# Altium PCB Dev_Brd_ATSAML10D16A.PcbDoc
Units mm, origin at the board's own origin, x right, y up, seen from the top; angles counter-clockwise.
Board outline 23 x 37.5 mm, 2 copper layers (Top Layer, Bottom Layer); 82 components, 51 nets, 219 pads, 91 vias.
Unrouted connection lines stored in the file: 2.
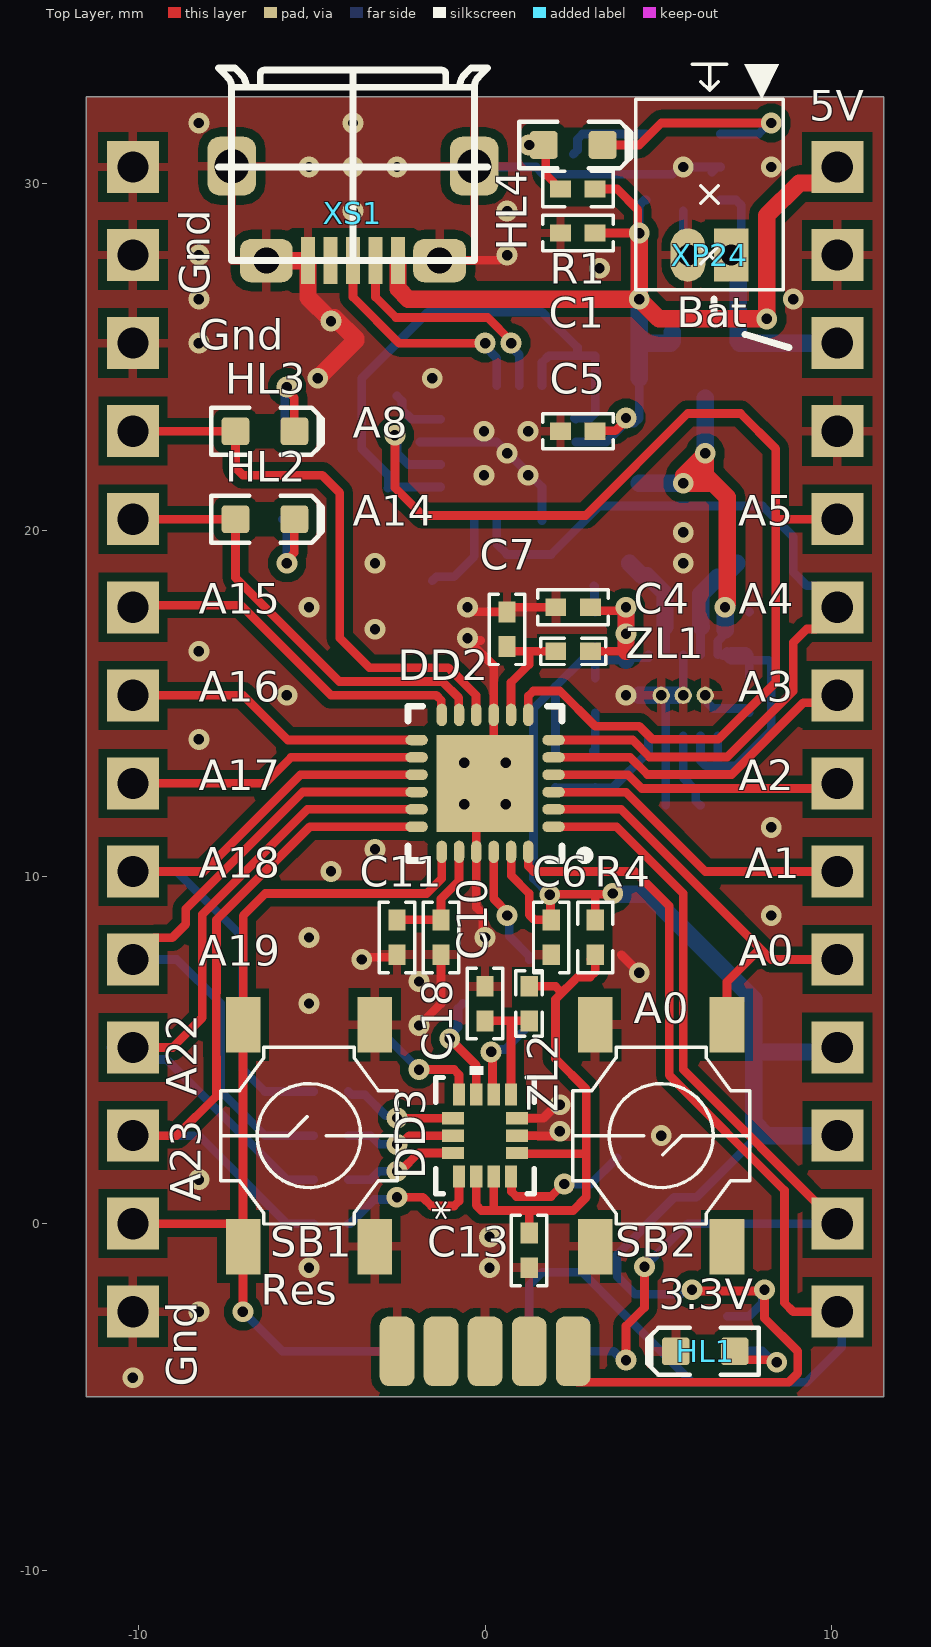
[diagram p0: Top Layer view]
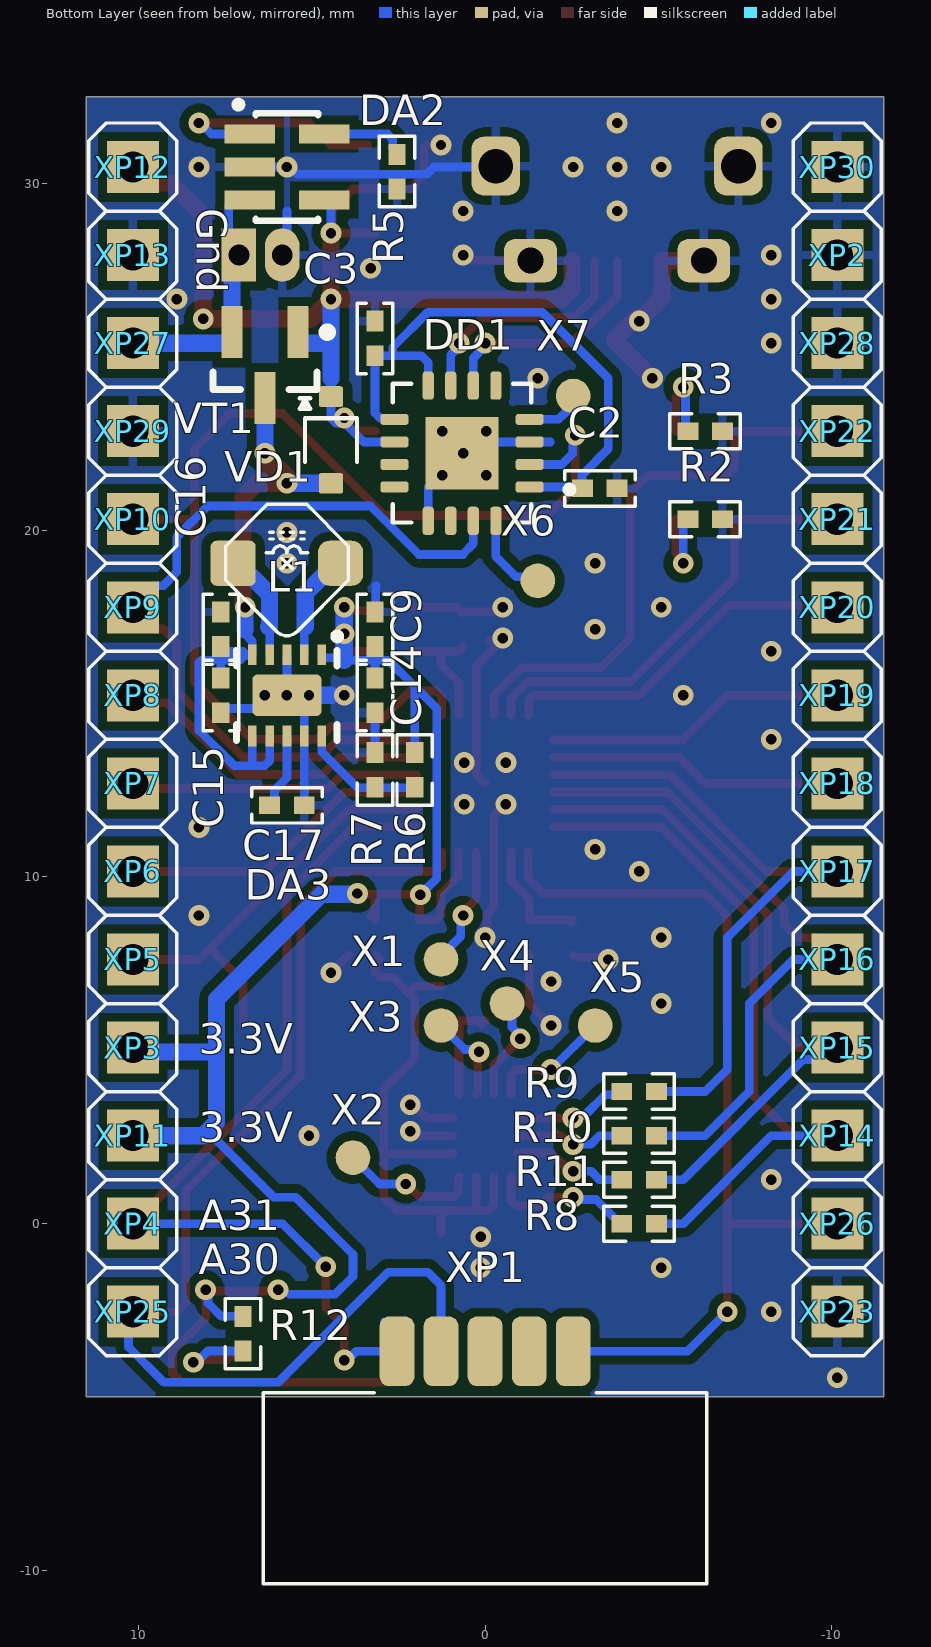
[diagram p1: Bottom Layer view, seen from below]
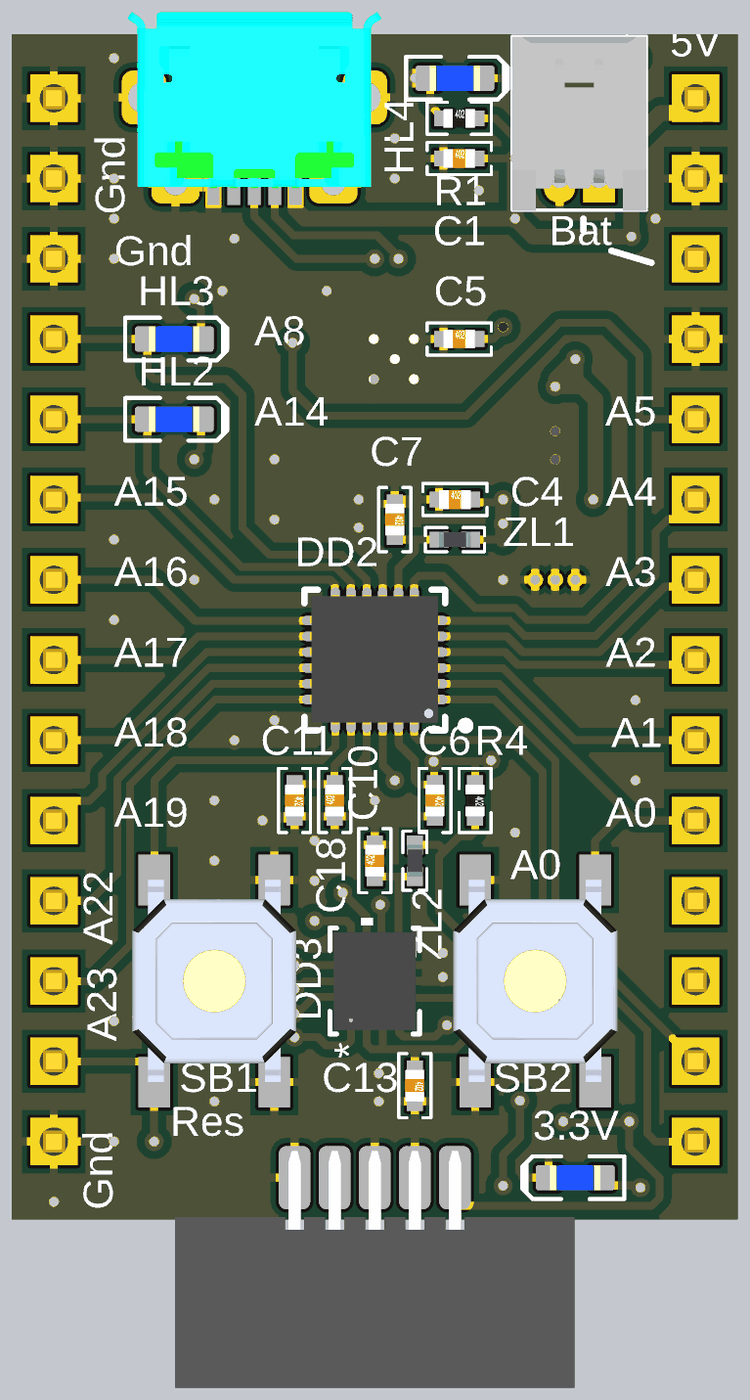
[diagram p2: 3D render of the assembled board from above, using the file's embedded part models]
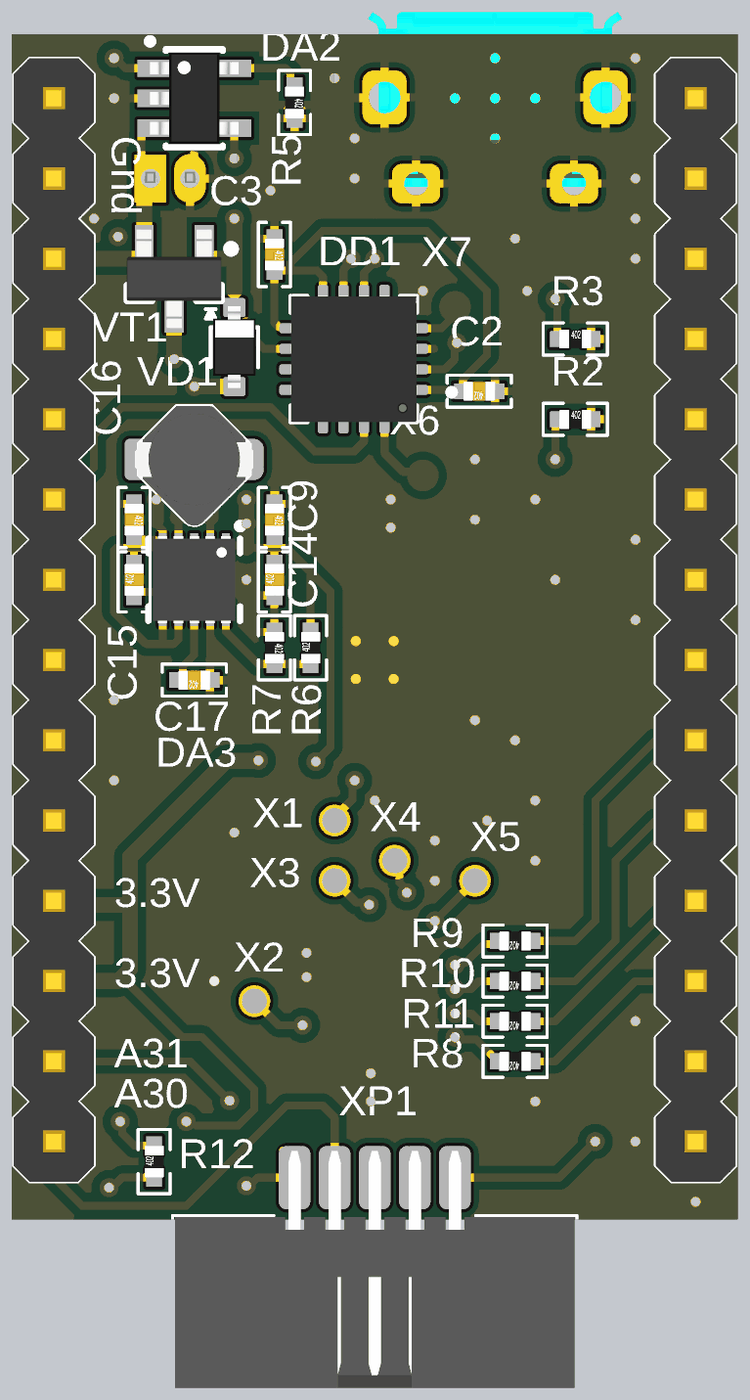
[diagram p3: 3D render of the assembled board from below, using the file's embedded part models]

## Layer stack, top to bottom
Top Solder: solder mask 0.0102, Solder Resist, Dk 3.5
Top Layer: signal copper 0.0356
Dielectric 1: dielectric 0.32, FR-4, Dk 4.8
Bottom Layer: signal copper 0.0356
Bottom Solder: solder mask 0.0102, Solder Resist, Dk 3.5

## Board outline
-11.5,-5 -11.5,32.5 11.5,32.5 11.5,-5

## Design rules (kind name [scope] priority, off if disabled: settings)
Clearance Clearance_InPoly [All vs InPoly] p1: gap=0.254 ignorepadtopadclearanceinfootprint=FALSE except(0: Arc-Hole Track-Hole SMDPad-Hole THPad-Hole Via-Hole Fill-Hole Poly-Hole Region-Hole Text-Hole)
Clearance [All] p2: gap=0.15 ignorepadtopadclearanceinfootprint=TRUE except(0: Arc-Hole Track-Hole SMDPad-Hole THPad-Hole Via-Hole Fill-Hole Poly-Hole Region-Hole Text-Hole)
ComponentClearance ComponentClearance_PLS [(ObjectKind = 'Component') And (Footprint = 'PLS-1-3D')] p1: gap=-1 collisioncheckmode=3 verticalgap=0.254 showdistances=FALSE
ComponentClearance [All] p2: gap=0.254 collisioncheckmode=3 verticalgap=0.254 showdistances=FALSE
PolygonConnect [All] p1: thpad.connectstyle=Relief thpad.reliefconductorwidth=0.254 thpad.reliefentries=4 thpad.polygonreliefangle="90 Angle" thpad.airgapwidth=0.254 smdpad.connectstyle=Relief smdpad.reliefconductorwidth=0.254 smdpad.reliefentries=4 smdpad.polygonreliefangle="90 Angle" smdpad.airgapwidth=0.254 via.connectstyle=Direct via.reliefconductorwidth=0.254 via.reliefentries=4 via.polygonreliefangle="90 Angle" via.airgapwidth=0.254
RoutingVias [All] p1: holewidth=0.5 width=0.8 viastyle="Through Hole" minholewidth=0.3 minwidth=0.6 maxholewidth=0.7 maxwidth=1
SolderMaskExpansion SolderMaskExpansion_IsVia [ISVia] p1: expansion=0.102 istentingtop=TRUE
SolderMaskExpansion [All] p2: expansion=0.102 istentingtop=FALSE
Width [All] p1: maxlimit=0.5 minlimit=0.15 preferedwidth=0.25
29 further rules are at their usual default settings.

## Components (designator, comment, footprint, x,y, rotation, side; value= is the part's Value field where it differs from the comment)
C1 "47uF 6.3V" CapKemet1005(0402) 2.675,28.575 r0 top
C2 "1u 10V" CapKemet1005(0402) -3.31,21.209 r0 bottom
C3 "100n 16V" CapKemet1005(0402) 3.175,25.535 r270 bottom
C4 "10u 6.3V 0402" CapKemet1005(0402) 2.54,17.78 r0 top
C5 "100n 16V" CapKemet1005(0402) 2.675,22.86 r0 top
C6 "100n 25V" CapKemet1005(0402) 1.905,8.255 r270 top
C7 "10u 6.3V 0402" CapKemet1005(0402) 0.635,17.145 r270 top
C9 "100n 16V" CapKemet1005(0402) 3.175,17.145 r270 bottom
C10 "10u 6.3V 0402" CapKemet1005(0402) -1.27,8.255 r90 top
C11 "100n 25V" CapKemet1005(0402) -2.54,8.255 r270 top
C13 "100n 25V" CapKemet1005(0402) 1.27,-0.77 r270 top
C14 "47uF 6.3V" CapKemet1005(0402) 3.175,15.24 r90 bottom
C15 "47uF 6.3V" CapKemet1005(0402) 7.62,15.24 r90 bottom
C16 "100n 16V" CapKemet1005(0402) 7.62,17.145 r270 bottom
C17 "100n 16V" CapKemet1005(0402) 5.715,12.065 r0 bottom
C18 "100n 25V" CapKemet1005(0402) 0,6.35 r90 top
DA2 "MCP73832T-2DFI/OT" SOT-23-5 5.715,30.48 r270 bottom
DA3 "TPS63031DSKT" WSON-10 5.715,15.24 r270 bottom
DD1 "FT230XQ-R" QFN-16(4x4) 0.665,22.225 r0 bottom
DD2 "ATSAML10D16A-MUT" VQFN-24 0,12.7 r180 top
DD3 "LSM6DSMTR" LGA-14L_2P5X3X0P83_STM-M 0,2.54 r90 top
HL1 "Bl 0603" LED-0603-BLUE 6.35,-3.683 r180 top
HL2 "Bl 0603" LED-0603-BLUE -6.35,20.32 r0 top
HL3 "Bl 0603" LED-0603-BLUE -6.35,22.86 r0 top
HL4 "Bl 0603" LED-0603-BLUE 2.54,31.115 r0 top
L1 "2.2UH 1.3" CDRH2D11 5.715,19.05 r90 bottom
R1 "620" "REZKemet 0402" 2.675,29.845 r0 top
R2 "620" "REZKemet 0402" -6.35,20.32 r180 bottom
R3 "620" "REZKemet 0402" -6.35,22.86 r180 bottom
R4 "0" "REZKemet 0402" 3.175,8.255 r270 top
R5 "5.1k" "REZKemet 0402" 2.54,30.345 r270 bottom
R6 "?" "REZKemet 0402" 2.032,13.089 r90 bottom
R7 "?" "REZKemet 0402" 3.175,13.089 r270 bottom
R8 "0" "REZKemet 0402" -4.445,0 r0 bottom
R9 "0" "REZKemet 0402" -4.445,3.81 r0 bottom
R10 "0" "REZKemet 0402" -4.445,2.54 r0 bottom
R11 "0" "REZKemet 0402" -4.445,1.27 r0 bottom
R12 "620" "REZKemet 0402" 6.985,-3.175 r90 bottom
SB1 "PTS525SM15SMTR2 LFS" "TACT_SWITCH KPT1187B" -5.08,2.54 r90 top
SB2 "PTS525SM15SMTR2 LFS" "TACT_SWITCH KPT1187B" 5.08,2.54 r270 top
VD1 "1N4148WSTR" SOD323 4.445,22.606 r270 bottom
VT1 "IRLML6401PbF" SOT23-3N 6.35,24.765 r270 bottom
X1 "PLLS1.27-1-TOP-R" PLLS1.27-1-TOP-R#1 1.27,7.62 r90 bottom
X2 "PLLS1.27-1-TOP-R" PLLS1.27-1-TOP-R#1 3.81,1.905 r90 bottom
X3 "PLLS1.27-1-TOP-R" PLLS1.27-1-TOP-R#1 1.27,5.715 r90 bottom
X4 "PLLS1.27-1-TOP-R" PLLS1.27-1-TOP-R#1 -0.635,6.35 r90 bottom
X5 "PLLS1.27-1-TOP-R" PLLS1.27-1-TOP-R#1 -3.175,5.715 r90 bottom
X6 "PLLS1.27-1-TOP-R" PLLS1.27-1-TOP-R#2 -1.524,18.542 r180 bottom
X7 "PLLS1.27-1-TOP-R" PLLS1.27-1-TOP-R#2 -2.54,23.876 r180 bottom
XP1 "3220-10-0100-00 edge" "IPS 10(1.27)edge" 0,-3.683 r180 bottom locked
XP2 "PLS-1" PLS-1-3D -10.16,27.94 r0 bottom
XP3 "PLS-1" PLS-1-3D 10.16,5.08 r0 bottom
XP4 "PLS-1" PLS-1-3D 10.16,0 r0 bottom
XP5 "PLS-1" PLS-1-3D 10.16,7.62 r0 bottom
XP6 "PLS-1" PLS-1-3D 10.16,10.16 r0 bottom
XP7 "PLS-1" PLS-1-3D 10.16,12.7 r0 bottom
XP8 "PLS-1" PLS-1-3D 10.16,15.24 r0 bottom
XP9 "PLS-1" PLS-1-3D 10.16,17.78 r0 bottom
XP10 "PLS-1" PLS-1-3D 10.16,20.32 r0 bottom
XP11 "PLS-1" PLS-1-3D 10.16,2.54 r0 bottom
XP12 "PLS-1" PLS-1-3D 10.16,30.48 r0 bottom
XP13 "PLS-1" PLS-1-3D 10.16,27.94 r0 bottom
XP14 "PLS-1" PLS-1-3D -10.16,2.54 r0 bottom
XP15 "PLS-1" PLS-1-3D -10.16,5.08 r0 bottom
XP16 "PLS-1" PLS-1-3D -10.16,7.62 r0 bottom
XP17 "PLS-1" PLS-1-3D -10.16,10.16 r0 bottom
XP18 "PLS-1" PLS-1-3D -10.16,12.7 r0 bottom
XP19 "PLS-1" PLS-1-3D -10.16,15.24 r0 bottom
XP20 "PLS-1" PLS-1-3D -10.16,17.78 r0 bottom
XP21 "PLS-1" PLS-1-3D -10.16,20.32 r0 bottom
XP22 "PLS-1" PLS-1-3D -10.16,22.86 r0 bottom
XP23 "PLS-1" PLS-1-3D -10.16,-2.54 r0 bottom
XP24 "0530480210" 0530480210 6.477,27.94 r0 top
XP25 "PLS-1" PLS-1-3D 10.16,-2.54 r0 bottom
XP26 "PLS-1" PLS-1-3D -10.16,0 r0 bottom
XP27 "PLS-1" PLS-1-3D 10.16,25.4 r0 bottom
XP28 "PLS-1" PLS-1-3D -10.16,25.4 r0 bottom
XP29 "PLS-1" PLS-1-3D 10.16,22.86 r90 bottom
XP30 "PLS-1" PLS-1-3D -10.16,30.48 r90 bottom
XS1 "10118194-0001LF" "MICRO_USB _B" -3.81,30.48 r180 top
ZL1 "BLM15PX471SN1D" Ferrite1005(0402) 2.54,16.51 r180 top
ZL2 "470Ohms@100MHz" Ferrite1005(0402) 1.27,6.35 r270 top

## Footprints (in the part's own frame and the unit in brackets; to place one, negate y for a bottom-side part, rotate by r counter-clockwise, add the part's x,y. Pads: shape width x height; smd on the part's side, far side on the other; paste and mask are expansions set on the pad)
0530480210 [mm] "CONN HEADER R/A 2POS 1.25MM"
  rect 1x1.524 hole 0.6: 1(0.625,0)
  oval 1x1.54 hole 0.6: 2(-0.625,0)
  silkscreen extent -2.12,-1 2.12,5.5, body extent -2.12,-1.02 2.12,4.48, height 3.35
CapKemet1005(0402) [mm] "Chip Capacitor, Body 1.0x0.5mm, IPC High Density"
  rect 0.6x0.5 smd: 1(-0.5,0) 2(0.5,0)
  silkscreen extent -1.02,-0.51 1.02,0.51, body extent -0.5,-0.3 0.5,0.3, height 0.2
CDRH2D11 [mm]
  rrect25% 1.3x1.3 smd: 1(0,1.55)
  rrect50% 1.3x1.3 smd: 2(0,-1.55)
  silkscreen extent -2.09,-1.77 1.7,1.77, body extent -2.33,-2.33 2.33,2.33, height 1.1
Ferrite1005(0402) [mm]
  rect 0.6x0.5 smd: 1(-0.5,0) 2(0.5,0)
  silkscreen extent -0.94,-0.38 0.94,0.38, body extent -0.5,-0.25 0.5,0.25, height 0.5
"IPS 10(1.27)edge" [mm]
  rrect50% 1x2 smd: 1(2.54,0) 3(1.27,0) 5(0,0) 7(-1.27,0) 9(-2.54,0)
  rrect50% 1x2 smd far side: 2(2.54,0) 4(1.27,0) 6(0,0) 8(-1.27,0) 10(-2.54,0)
  silkscreen extent -6.4,-6.7 6.4,-1.2, body extent -6.32,-6.65 6.33,0.85, height 2.45
LED-0603-BLUE [mm]
  round 0.254 on Mech15: 0(0,0)
  rrect25% 0.8x0.8 smd: A(-0.85,0) K(0.85,0)
  Top Layer pour cut-out: -0.5,0.5 0.5,0.5 0.5,-0.5 -0.5,-0.5
  silkscreen extent -1.55,-0.67 1.68,0.67, body extent -0.8,-0.4 0.8,0.4, height 0.75
LGA-14L_2P5X3X0P83_STM-M [mil]
  rect 25x14 smd paste+0 mask+0: 1(-46.5,29.53) 2(-46.5,9.84) 3(-46.5,-9.84) 4(-46.5,-29.53) 8(46.5,-29.53) 9(46.5,-9.84) 10(46.5,9.84) 11(46.5,29.53)
  rect 14x25 smd paste+0 mask+0: 5(-19.68,-36.5) 6(0,-36.5) 7(19.68,-36.5) 12(19.68,36.5) 13(0,36.5) 14(-19.68,36.5)
  silkscreen extent -66,-56 79,56, body extent -61,-51 61,51, height 34
"MICRO_USB _B" [mm]
  rect 0.4x1.35 smd: 1(-1.3,2.7) 2(-0.65,2.7) 3(0,2.7) 4(0.65,2.7) 5(1.3,2.7)
  rrect50% 1.4x1.7 hole 1: 6(-3.5,-0.025) 6(3.5,-0.025)
  rrect50% 1.524x1.25 hole 0.75: 6(-2.5,2.7) 6(2.5,2.7)
  silkscreen extent -3.88,-2.85 3.88,2.7, body extent -4.02,-2.73 4.02,2.85, height 2.63
PLLS1.27-1-TOP-R#1 [mm]
  round 1 smd paste-0.1: 1(0,0)
PLLS1.27-1-TOP-R#2 [mm]
  round 1 smd paste-25.375 mask+0.102: 1(0,0)
PLS-1-3D [mm] "Connector; Header; 1 Position"
  rect 1.5x1.5 hole 0.9: 1(0,0)
  silkscreen extent -1.27,-1.27 1.27,1.27, body extent -1.27,-1.27 1.27,1.27, height 8.44
QFN-16(4x4) [mm]
  rrect50% 0.81x0.32 smd: 1(-1.95,0.975) 2(-1.95,0.325) 3(-1.95,-0.325) 4(-1.95,-0.975) 9(1.95,-0.975) 10(1.95,-0.325) 11(1.95,0.325) 12(1.95,0.975)
  rrect50% 0.32x0.81 smd: 5(-0.975,-1.95) 6(-0.325,-1.95) 7(0.325,-1.95) 8(0.975,-1.95) 13(0.975,1.95) 14(0.325,1.95) 15(-0.325,1.95) 16(-0.975,1.95)
  rect 2.1x2.1 smd paste-2: 17(0,0)
  silkscreen extent -3.2,-2 2,2, body extent -2,-2 2,2, height 0.92
"REZKemet 0402" [mm] "Chip Capacitor, Body 1.0x0.5mm, IPC High Density"
  rect 0.6x0.5 smd: 1(-0.5,0) 2(0.5,0)
  silkscreen extent -1.02,-0.51 1.02,0.51, body extent -0.5,-0.3 0.5,0.3, height 0.2
SOD323 [mm] "SOD-323; 2 Leads; Body 1.8 x 1.35 mm, (LxW)"
  round 0.508 on Mech15: 0(0,0)
  rrect25% 0.6x0.7 smd: 1(-1.25,0) 2(1.25,0)
  silkscreen extent -1.2,-0.9 0.64,0.75, body extent -1.3,-0.68 1.3,0.67, height 1.1
SOT23-3N [mm] "SOT23, 3-Leads, Body 2.9x1.3mm, Pitch 0.95mm, Lead Span 2.5mm, IPC Medium Density"
  rect 1.5x0.6 smd: 1(-0.95,0.95) 2(-0.95,-0.95) 3(0.95,0)
  silkscreen extent -1.07,-1.5 0.7,1.92, body extent -1.57,-1.5 1.57,1.5, height 1
SOT-23-5 [mm] "SOT-23/SC-74A; 5 Leads; Body 3 x 3.1 mm, inc. leads (LxW max)"
  rect 0.55x1.45 smd: 1(-0.95,-1.075) 2(0,-1.075) 3(0.95,-1.075) 4(0.95,1.075) 5(-0.95,1.075)
  silkscreen extent -1.9,-1.5 1.55,0.9, body extent -1.45,-1.4 1.45,1.4, height 1.45
"TACT_SWITCH KPT1187B" [mm] "SMD_Button 5.2x5.2x1.6"
  rect 1.6x1 smd: 1(-3.2,1.9) 1(3.2,1.9) 2(-3.2,-1.9) 2(3.2,-1.9)
  silkscreen extent -2.55,-2.55 2.55,2.55, body extent -3.2,-2.6 3.2,2.6, height 1.5
VQFN-24 [mm] "QFN, 24-Leads, Body 4x4mm, Pitch 0.5mm, IPC High Density"
  oval 0.65x0.3 smd: 1(-1.975,1.25) 2(-1.975,0.75) 3(-1.975,0.25) 4(-1.975,-0.25) 5(-1.975,-0.75) 6(-1.975,-1.25) 13(1.975,-1.25) 14(1.975,-0.75) 15(1.975,-0.25) 16(1.975,0.25) 17(1.975,0.75) 18(1.975,1.25)
  oval 0.3x0.65 smd: 7(-1.25,-1.975) 8(-0.75,-1.975) 9(-0.25,-1.975) 10(0.25,-1.975) 11(0.75,-1.975) 12(1.25,-1.975) 19(1.25,1.975) 20(0.75,1.975) 21(0.25,1.975) 22(-0.25,1.975) 23(-0.75,1.975) 24(-1.25,1.975)
  rect 2.8x2.8 smd: 25(0,0)
  silkscreen extent -3,-2.22 2.22,2.22, body extent -2.05,-2.07 2.05,2.03, height 1
WSON-10 [mm] "SON, 10-Leads, Body 2,50x2,50mm,"
  rect 0.6x0.25 smd: 1(-1.17,1) 2(-1.17,0.5) 3(-1.17,0) 4(-1.17,-0.5) 5(-1.17,-1) 6(1.17,-1) 7(1.17,-0.5) 8(1.17,0) 9(1.17,0.5) 10(1.17,1)
  round 0.5 hole 0.3: 11(0,-0.635) 11(0,0) 11(0,0.635)
  rrect25% 1.2x2 smd: 11(0,0)
  silkscreen extent -1.8,-1.45 1.3,1.55, body extent -1.38,-1.3 1.38,1.3, height 0.8

## Part data
C1 C14 C15: library part GRM188R60J476ME15D, "CAP CER 47UF 6.3V X5R 0603", Digi-Key Part Number=490-13247-1-ND, Package=0603, HelpURL=https://www.digikey.com/en/products/detail/murata-electronics/GRM188R60J476ME15D/5877410, Manufacturer Part Number=GRM188R60J476ME15D, Part Number=GRM188R60J476ME15D, Price$=0.16924
C2: library part CAPC1005(0402)N, "CAP CER 1UF 10V 10% X6S 0402", Manufacturer Part Number=LMK105BJ105KPLF, Mouser Part Number=963-LMK105BJ105KPLF, Package=0402, HelpURL=https://eu.mouser.com/ProductDetail/Taiyo-Yuden/LMK105BJ105KPLF?qs=sGAEpiMZZMs0AnBnWHyRQIHQ3Mw87cdo1QzgwSlYWOQcjHYBR0FFrA%3D%3D, Part Number=CAPC1005(0402)N, Price$=0.11
C3 C5 C9 C16 C17: library part CL05F104ZO5NNNC, "Cap Cer 0.1uF 16V 1% C0G(NP0) MLCC", Digi-Key Part Number=1276-1004-1-ND, Package=0402, HelpURL=https://www.digikey.com/product-detail/en/CL05F104ZO5NNNC/1276-1004-1-ND/3889090/?itemSeq=332907103, Manufacturer Part Number=CL05F104ZO5NNNC, Part Number=CL05F104ZO5NNNC, Price$=0.00475
C4 C7 C10: library part CAPC1608(0603), "CAP CER 10UF 6.3V X5R 0402", Digi-Key Part Number=GRJ155R60J106ME11D, Code_JEDEC=0402, HelpURL=https://www.digikey.com/product-detail/en/murata-electronics-north-america/GRJ155R60J106ME11D/490-13211-1-ND/5877419, Manufacturer Part Number=GRJ155R60J106ME11D, Part Number=CAPC1608(0603), Price$=0.22
C6 C11: library part CAPC1608(0603), "CAP CER 0.1UF 25V X5R 0402", Digi-Key Part Number=732-7495-1-ND, Manufacturer Part Number=885012105018, Code_JEDEC=0402, HelpURL=https://www.digikey.com/product-detail/en/wurth-electronics-inc/885012105018/732-7495-1-ND/5454122, Part Number=CAPC1608(0603), Price$=0.11
C13 C18: library part CL05B104KA5NNNC, "CAP CER 0.1UF 25V X7R 0402", Digi-Key Part Number=1276-6720-1-ND, Package=0402, HelpURL=https://www.digikey.com/en/products/detail/samsung-electro-mechanics/CL05B104KA5NNNC/5961204, Manufacturer Part Number=CL05B104KA5NNNC, Part Number=CL05B104KA5NNNC, Price$=0.00487
DA2: "IC LI-ION/LI-POLY CTRLR SOT23-5", Digi-Key Part Number=MCP73832T-2DFI/OTCT-ND, HelpURL=https://www.digikey.com/product-detail/en/MCP73832T-2DFI%2fOT/MCP73832T-2DFI%2fOTCT-ND/2060344/?itemSeq=274027917, Part Number=MCP73832T-2DFI/OT
DA3: "IC REG BCK BST 3.3V 900MA 10SON", Digi-Key Part Number=296-23904-1-ND, HelpURL=https://www.digikey.com/en/products/detail/texas-instruments/TPS63031DSKT/1967863, Manufacturer Part Number=TPS63031DSKT, Part Number=TPS63031DSKT, Price$=2,28
DD1: "IC USB SERIAL BASIC UART 16QFN", Digi-Key Part Number=768-1130-1-ND, HelpURL=https://www.digikey.com/en/products/detail/ftdi-future-technology-devices-international-ltd/FT230XQ-R/3029142, Manufacturer Part Number=FT230XQ-R, Part Number=FT230XQ-R, Price$=2,04
DD2: "IC MCU 32BIT 64KB FLASH 24VQFN,ARM® Cortex®-M23", Digi-Key Part Number=ATSAML10D16A-MUTCT-ND, Code_JEDEC=VQFN-24, HelpURL=https://www.digikey.com/product-detail/en/microchip-technology/ATSAML10D16A-MUT/ATSAML10D16A-MUTCT-ND/9360576, Manufacturer Part Number=ATSAML10D16A-MUT, Part Number=ATSAML10D16A-MUT, Price$=1.82
DD3: "IMU ACCEL/GYRO I2C/SPI 14LGA", Digi-Key Part Number=497-16696-1-ND, Mouser Part Number=511-LSM6DSMTR, Built_By=EMA_Cory, Copyright="Copyright (C) 2018 Accelerated Designs. All rights reserved", Datasheet=https://www.st.com/content/ccc/resource/technical/document/datasheet/76/27/cf/88/c5/03/42/6b/DM00218116.pdf/files/DM00218116.pdf/jcr:content/translations/en.DM00218116.pdf, HelpURL=https://eu.mouser.com/ProductDetail/STMicroelectronics/LSM6DSMTR?qs=dTJS0cRn7ogKkf7uVmbVmg%3D%3D, HelpURL2=#https://www.digikey.com/product-detail/en/stmicroelectronics/LSM6DSMTR/497-16696-1-ND/6192778#, Manufacturer Part Number=LSM6DSMTR, Manufacturer_Part_Number=LSM6DSMTR, Part Number=LSM6DSMTR, Price$=2.92, RefDes=RefDes, SourceLibrary=Updates_to_database_2020-11-03, Type=DEV, Vendor=STMicroelectronics
HL1 HL2 HL3 HL4: library part 150060BS55040, "LED BLUE DIFFUSED 0603 SMD", Digi-Key Part Number=732-12013-1-ND, Package=0603, HelpURL=https://www.digikey.com/products/en?keywords=732-12013-1-ND, Manufacturer Part Number=150060BS55040, Part Number=150060BS55040
L1: library part CDRH2D11/HPNP-2R2NC, "FIXED IND 2.2UH 1.3A 120 MOHM", Digi-Key Part Number=308-1578-1-ND, HelpURL=https://www.digikey.com/product-detail/en/sumida-america-components-inc/CDRH2D11-HPNP-2R2NC/308-1578-1-ND/2620850, LatestRevisionDate=17-Jul-2002, LatestRevisionNote="Re-released for DXP Platform.", Manufacturer Part Number=CDRH2D11/HPNP-2R2NC, PackageDescription="Axial Device, Thru-Hole; 2 Leads; 0.9 in Pin Spacing", PackageReference=AXIAL-0.9, Part Number=CDRH2D11/HPNP-2R2NC, Price$=0.69, Published=24-Mar-1999, Publisher="Altium Limited"
R1 R2 R3 R6 R7 R12: library part RESC1005(0402), Package=0402, Part Number=RESC1005(0402)
R4 R8 R9 R10 R11: library part RMCF0402ZT0R00, "RES SMD 0402 0 Ohm", Mouser Part Number=RMCF0402ZT0R00CT-ND, Package=0402, HelpURL=https://www.digikey.com/en/products/detail/stackpole-electronics-inc/RMCF0402ZT0R00/1756905, Manufacturer Part Number=RMCF0402ZT0R00, Part Number=RMCF0402ZT0R00, Price$=0.00186
R5: library part RESC1005(0402), "RES SMD 5.1K OHM 1% 1/10W 0402", Manufacturer Part Number=ERJ-2RKF5101X, Mouser Part Number=755-SFR01MZPF5101, Package=0402, HelpURL=https://eu.mouser.com/ProductDetail/ROHM-Semiconductor/SFR01MZPF5101?qs=sGAEpiMZZMvdGkrng054t7z4BkURc4Lz8VVRSaz2ejIiXEQeYNXBXw%3D%3D, Part Number=RESC1005(0402), Price$=0.1
SB1 SB2: "SWITCH TACTILE SPST-NO 0.02A 15V", Digi-Key Part Number=CKN9104CT-ND, HelpURL=https://www.digikey.com/products/en?keywords=CKN9104CT-ND, Manufacturer Part Number="PTS525SM15SMTR2 LFS", Part Number="PTS525SM15SMTR2 LFS", Price$=0.33
VD1: "DIODE GEN PURP 75V 300MA SOD323", Digi-Key Part Number=1655-1359-1-ND, Manufacturer Part Number=?, Code_JEDEC=DO-204-AH, ComponentLink1Description="Manufacturer Link", ComponentLink1URL=http://www.fairchildsemi.com/, ComponentLink2Description=Datasheet, ComponentLink2URL=http://www.fairchildsemi.com/ds/1N%2F1N4148.pdf, DatasheetVersion=1997, HelpURL=https://www.digikey.com/product-detail/en/smc-diode-solutions/1N4148WSTR/1655-1359-1-ND/6022804, LatestRevisionDate=17-Jul-2002, LatestRevisionNote="Re-released for DXP Platform.", Note=?, Package=?, PackageDescription="Diode, Axial; Body 3.8 x 1.9 mm (LxDia. max), Lead Dia. 0.53 mm (max)", PackageReference=DO-35, Part Number=1N4148WSTR, Price$=?, Published=8-Jun-2000, Publisher="Altium Limited"
VT1: Digi-Key Part Number=???, HelpURL=https://www.infineon.com/dgdl/irlml6401pbf.pdf?fileId=5546d462533600a401535668b96d2634, Manufacturer Part Number=???, Note=???, Package=???, Part Number=IRLML6401PbF, Price$=???
XP1: "3220-10-0100-00", Digi-Key Part Number=1175-1627-ND, Package="Header 20POS 1.27mm", HelpURL=https://www.digikey.com/product-detail/en/cnc-tech/3220-10-0100-00/1175-1627-ND/3883661, Part Number="3220-10-0100-00 edge"
XP2 XP3 XP4 XP5 XP6 XP7 XP8 XP9 XP10 XP11 XP12 XP13 XP14 XP15 XP16 XP17 XP18 XP19 XP20 XP21 XP22 XP23 XP25 XP26 XP27 XP28 XP29 XP30: "CONN HEADER VERT 1POS", Digi-Key Part Number=S1011EC-01-ND, Manufacturer Part Number=PRPC001SAAN-RC, HelpURL=https://www.digikey.com/product-detail/en/sullins-connector-solutions/PRPC001SAAN-RC/S1011EC-01-ND/2775253, Part Number=PLS-1, Price$=0.05
XP24: "CONN HEADER R/A 2POS 1.25MM", Digi-Key Part Number=WM1742-ND, HelpURL=https://www.digikey.com/product-detail/en/molex/0530480210/WM1742-ND/242864, Manufacturer Part Number=0530480210, Part Number=0530480210, Price$=0.3
XS1: "USB Connectors 5P MICRO USB TYPE B RCPT W/ REAR PEGS", Digi-Key Part Number=609-4618-1-ND, Mouser Part Number=649-10118194-0001LF, HelpURL=https://eu.mouser.com/ProductDetail/Amphenol-FCI/10118194-0001LF?qs=%2Fha2pyFadugHQYubHEjQrWaf71KglMlHbfZ%2FBmSxIoqAM0lAnkBayw%3D%3D, Manufacturer Part Number=10118194-0001LF, Part Number=10118194-0001LF, Price$=0.265
ZL1: library part Ferrite1005(0402), "FERRITE BEAD 470 OHM 0402 1LN", Digi-Key Part Number=490-10662-1-ND, Code_JEDEC=0402, Manufacturer Part Number=BLM15PX471SN1D, Part Number=Ferrite1005(0402), Price$=0.15
ZL2: library part Ferrite1005(0402), "FERRITE BEAD 470 OHM 0402 1LN", Manufacturer Part Number=BLM15PX471SN1D, Package=0402, HelpURL=https://eu.mouser.com/ProductDetail/Murata-Electronics/BLM15PX471SN1D?qs=%2Fha2pyFadugFXr5biOyskwIVnWnam4MScgU55pluOIVbLGfRcJswjw%3D%3D, Mouser Part Number=BLM15PX471SN1D, Part Number=Ferrite1005(0402), Price$=0.14
X1 X2 X3 X4 X5 X6 X7: Part Number=PLLS1.27-1-TOP-R

## Via types
v1: diameter 0.6, hole 0.3, Top Layer to Bottom Layer, tented both sides, 91 vias

## Nets (pads, with @x,y where several pads share a name; then routed paths per layer and width w, separated by ;. In a path a pad name is that pad's centre, name@x,y a point inside that pad or via, vN(x,y) a via of type N, cw(c..) or ccw(c..) an arc to the next point about the centre after c; other vN are vias at no path point)
3,3V: C4.2 C6.1 C9.2 C14.2 DA3.1 DD2.23 R4.1 R6.2 R12.2 XP1.10 XP3.1 XP11.1 ZL1.1 | length 59.4
  Top Layer w0.25: DD2.23 0.76,10.715 0.76,10.035 1.27,9.525 1.27,8.909 1.416,8.763 C6.1@1.897,8.763 ; C6.1 C6.1@1.897,8.763 ; XP1.10@2.667,-4.572 8.763,-4.572 9.017,-4.318 9.017,-3.683 8.061,-2.727 v1@8.061,-1.945 ; ZL1.1 3.165,16.385 3.215,16.435 3.215,16.51 4.064,16.51 ; C4.2 3.136,17.684 3.874,17.684 3.902,17.713 4.035,17.713 4.064,17.684 v1(4.064,17.018) ; R4.1@3.3,8.88 R4.1 3.175,9.506 ; v1(3.683,9.525) 3.664,9.506 3.175,9.506 ; v1(5.969,-1.905) 6.009,-1.945 v1@8.061,-1.945 ; v1(8.061,-1.905) v1@8.061,-1.945 ; C6.1@1.897,8.763 1.886,8.774 1.886,9.467 v1(1.866,9.486) 1.886,9.506 3.175,9.506
  Top Layer w0.5: 4.064,16.51 v1(4.064,17.018) v1(4.064,17.78)
  Bottom Layer w0.25: v1(1.866,9.486) 1.397,9.955 1.397,14.859 2.032,15.494 ; R6.2 2.032,15.494 ; C14.2 3.175,16.256 ; C9.2 3.175,16.256 ; DA3.1 4.715,16.323 4.131,16.323 4.064,16.256 3.175,16.256 ; 5.648,-2.032 4.318,-2.032 3.81,-1.524 3.81,-0.889 5.461,0.762 6.096,0.762 8.001,2.667 ; R12.2 7.61,-2.675 7.994,-2.291 7.994,-1.972 v1(8.061,-1.905) ; 2.032,15.494 2.794,16.256 3.175,16.256
  Bottom Layer w0.5: v1(3.683,9.525) 3.702,9.506 4.718,9.506 7.747,6.477 7.747,2.921 8.128,2.54 XP11.1 ; 4.064,16.256 v1(4.064,17.018) v1(4.064,17.78) ; 7.874,4.953 10.033,4.953 XP3.1
+5V: C1.2 C5.2 DA2.4 DD1.10 R1.2 VD1.1 VT1.1 XP12.1 XS1.1 | length 31.4
  Top Layer w0.25: C5.2 3.183,22.868 3.756,22.868 v1@4.064,23.176 ; C1.2 v1(4.445,28.575) 4.405,28.615 4.405,29.25 3.81,29.845 R1.2
  Top Layer w0.5: XS1.1 -2.51,26.963 -2.217,26.67 v1(4.445,26.67) ; v1(4.445,28.575) v1(4.445,26.67) ; XP12.1 9.697,30.017 9.062,30.017 8.128,29.083 v1(8.128,26.1) 5.015,26.1 v1(4.445,26.67)
  Bottom Layer w0.25: DD1.10 3.5,22.55 3.917,22.967 ; v1@4.064,23.114 4.091,23.087 4.299,23.087 4.445,23.233 VD1.1 4.445,24.384 ; v1(4.445,28.575) 4.445,29.38 4.595,29.53 DA2.4
  Bottom Layer w0.5: 4.445,24.384 4.445,25.4 ; v1(4.445,26.67) 4.445,25.4 ; VT1.1 5.4,25.45 5.35,25.4 4.445,25.4
  other v1: 4.064,23.241
But: DD2.2 SB2.1 XP5.1 | length 12.6
  Top Layer w0.25: DD2.2 3.925,11.95 7.938,7.938 ; SB2.1@6.98,5.74 6.98,6.98 7.938,7.938 ; XP5.1 9.525,7.62 8.255,7.62 7.938,7.938
GND: C1.1 C2.1 C3.1 C4.1 C5.1 C6.2 C7.1 C9.1 C10.1 C11.2 C13.2 C14.1 C15.1 C16.1 C17.1 C18.2 DA2.2 DA3.3 DA3.9 DA3.11 DD1.3 DD1.13 DD1.17 DD2.9 DD2.21 DD2.25 DD3.6 DD3.7 HL1.K R2.2 R3.2 R5.2 R7.1 SB1.2 SB2.2 XP1.2 XP1.6 XP1.8 XP2.1 XP13.1 XP23.1 XP24.2 XP28.1 XP29.1 XP30.1 XS1.5 XS1.6 | length 49.5
  Top Layer w0.25: v1(-3.556,7.62) -3.494,7.682 -2.612,7.682 C11.2 ; v1(-1.905,5.715) -1.27,6.35 C10.1 ; XS1.6@-1.3,27.78 -1.285,27.795 0.395,27.795 0.54,27.94 v1(0.635,27.94) ; v1(-0.6,12.1) -0.25,11.75 DD2.21 -0.25,9.12 -0.06,8.93 -0.06,8.315 v1(0,8.255) ; v1(-0.508,16.891) v1@-0.439,16.822 ; v1(-0.508,17.78) -0.413,17.78 -0.282,17.649 0.631,17.649 C7.1 ; XS1.6@-0.31,30.505 XS1.6@-0.285,30.48 ; -0.127,16.822 v1@-0.439,16.822 ; DD2.25 0.25,12.95 DD2.9 0.25,16.091 -0.439,16.78 v1@-0.439,16.822 ; C7.1@0.654,17.614 0.666,17.614 0.831,17.78 C4.1 ; DD3.6 1.937,2.54 2.064,2.667 v1(2.159,2.667) ; DD3.7 1.675,3.04 2.064,3.429 v1(2.159,3.429) ; 3.929,7.755 v1(4.445,7.239) ; v1@5.675,30.44 v1(5.715,30.48)
  Top Layer w0.5: XS1.6@-6.31,27.78 XS1.5 -5.11,26.727 -4.451,26.068 v1@-4.412,26.068 ; v1(-4.826,24.384) -3.732,25.478 -3.732,25.527 v1@-4.343,26.137
  Bottom Layer w0.25: -1.879,22.55 DD1.3 0.34,22.55 DD1.17 1.64,21.25 DD1.13 ; XS1.6@-0.31,30.505 -0.285,30.48 1.471,30.48 1.681,30.27 5.408,30.27 5.618,30.48 v1(5.715,30.48) DA2.2 6.695,30.48 DA2.2@6.545,30.33 ; R7.1@3.128,13.636 R7.1 C14.1 ; 3.138,18.398 3.156,18.379 3.156,17.664 C9.1 ; DA3.11@5.08,15.24 5.08,15.172 5.215,15.037 DA3.9 C17.1 ; DA3.11@5.715,15.24 DA3.3 ; 5.715,29.21 5.715,28.077 XP24.2 ; DA3.11@6.35,15.113 6.35,15.088 6.588,14.85 6.867,14.85 ; DA3.11@6.604,14.859 7.501,14.859 C15.1 ; C16.1 C16.1@7.628,17.653
  Bottom Layer w0.5: 4.445,15.24 5.08,15.24 DA3.11@5.715,15.24
  other v1: -10.16,-4.445 -8.255,-2.54 -5.08,-1.27 0.127,-1.27 0.127,-0.381 -8.255,1.27 5.08,2.54 -5.08,6.35 -1.905,6.985 -5.08,8.255 8.255,8.89 -4.445,10.16 -3.175,10.795 8.255,11.43 0.6,12.1 -0.6,13.3 0.6,13.3 -8.255,13.97 -5.715,15.24 4.064,15.24 -8.255,16.51 -3.175,17.145 -5.08,17.78 -3.175,19.05 5.715,19.05 5.715,19.939 -0.03,21.59 1.24,21.59 0.635,22.225 -0.03,22.86 1.24,22.86 -1.524,24.384 -8.255,25.4 -4.445,26.035 -8.255,26.67 8.89,26.67 3.302,27.559 -8.255,27.94 -3.81,29.21 0.635,29.21 -5.08,30.48 -3.81,30.48 -2.54,30.48 8.255,30.48 1.27,31.115 -8.255,31.75 -3.81,31.75
LED_BLUE: DD2.11 HL2.A XP21.1 | length 13
  Top Layer w0.25: XP21.1 HL2.A -7.2,18.63 -4.21,15.64 -1.231,15.64 -0.76,15.168 -0.76,14.685 DD2.11
LED_GREEN: DD2.10 HL3.A XP22.1 | length 16.7
  Top Layer w0.25: XP22.1 HL3.A@-7.239,22.86 ; HL3.A -7.2,21.805 -6.985,21.59 -4.699,21.59 -4.191,21.082 -4.191,16.891 -3.34,16.04 -1.066,16.04 -0.901,15.875 -0.889,15.875 -0.26,15.246 -0.26,14.685 DD2.10
MCU_RX: DD1.15 DD2.6 XP9.1 | length 24
  Top Layer w0.25: DD2.6 4.257,13.95 4.745,13.462 6.985,13.462 8.89,15.367 8.89,16.764 9.281,17.155 9.535,17.155 XP9.1
  Bottom Layer w0.25: DD1.15 0.34,19.612 0.635,19.317 0.635,19.304 1.905,19.304 3.302,20.701 8.001,20.701 8.89,19.812 8.89,18.796 9.281,18.405 9.535,18.405 XP9.1
MCU_TX: DD1.2 DD2.7 XP10.1 | length 33.9
  Top Layer w0.25: v1(-2.6,22.742) -2.6,21.231 -1.797,20.428 2.902,20.428 5.842,23.368 7.366,23.368 8.382,22.352 8.382,20.32 ; DD2.7 1.25,15.221 1.396,15.367 2.159,15.367 3.176,14.35 4.446,14.35 4.826,13.97 6.731,13.97 8.382,15.621 8.382,20.32 ; XP10.1 8.382,20.32
  Bottom Layer w0.25: v1(-2.6,22.742) -2.533,22.675 -2.533,22.218 -2.215,21.9 DD1.2
NetC2_2: C2.2 C3.2 DD1.1 DD1.8 DD1.9 | length 17.3
  Bottom Layer w0.25: C2.2 C2.2@-2.794,21.225 ; DD1.1 -2.769,21.25 C2.2@-2.794,21.225 ; DD1.8 1.64,24.839 1.836,25.035 2.667,25.035 ; DD1.9@2.577,23.235 2.612,23.2 DD1.9 2.65,23.235 3.029,23.235 3.175,23.381 C3.2@3.175,24.985 ; C3.2 C3.2@3.175,24.985 ; C2.2@-2.794,21.225 -2.794,21.59 -3.556,22.352 -3.556,24.384 -1.651,26.289 1.651,26.289 2.667,25.273 2.667,25.035 ; 2.667,25.035 3.125,25.035 C3.2@3.175,24.985
NetC7_2: C7.2 DD2.8 ZL1.2 | length 3.5
  Top Layer w0.25: C7.2 0.635,16.635 0.76,16.51 1.27,16.51 ; DD2.8 0.75,15.609 1.27,16.129 1.27,16.51 ; ZL1.2 1.27,16.51
NetC10_2: C10.2 C11.1 DD2.20 | length 3.5
  Top Layer w0.25: C11.1 -2.485,8.7 -2.415,8.771 C10.2@-1.395,8.771 ; C10.2 -1.286,8.771 C10.2@-1.395,8.771 ; DD2.20 -0.75,9.892 -1.273,9.369 -1.273,8.893 C10.2@-1.395,8.771
NetC13_1: C13.1 DD3.2 DD3.3 DD3.5 R4.2 ZL2.1 | length 17.1
  Top Layer w0.25: -0.254,0.762 -0.254,0.527 -0.108,0.381 0.254,0.381 ; -0.25,0.762 DD3.2 ; DD3.3 0.25,0.385 0.254,0.381 ; DD3.5 0.955,2.012 2.901,2.012 2.921,2.032 ; C13.1 1.27,0.381 ; ZL2.1 2.024,6.85 2.032,6.842 2.215,6.66 ; R4.2@3.05,7.63 R4.2 3.175,7.258 3.029,7.112 2.667,7.112 2.54,6.985 2.215,6.66 ; 0.254,0.381 1.27,0.381 ; 1.27,0.381 2.54,0.381 2.921,0.762 2.921,2.032 ; 2.215,6.66 2.032,6.477 2.032,4.764 2.921,3.875 2.921,2.032
NetC15_2: C15.2 C16.2 DA3.5 DA3.6 DA3.7 VD1.2 VT1.3 | length 19.4
  Top Layer w0.5: v1(6.35,22.225) v1@6.35,22.198 ; 6.595,21.345 6.35,21.59 v1@6.35,22.198 ; v1(6.92,17.78) 6.92,17.807 6.985,17.872 6.985,20.955 6.584,21.356 v1(5.715,21.356) 5.734,21.375 5.734,21.582 v1@6.35,22.198
  Bottom Layer w0.25: DA3.7 6.215,13.354 6.361,13.208 6.715,13.208 ; DA3.6 6.715,13.208 ; DA3.5 6.715,16.804 6.933,17.022 6.933,17.117 6.927,17.123 ; v1(6.92,17.78) v1@6.927,17.773 ; 6.985,16.51 6.858,16.383 7.112,16.383 ; C16.2@7.493,16.383 7.62,16.383 7.62,16.256 ; C15.2 7.62,16.256 ; 6.715,13.208 7.239,13.208 8.255,14.224 8.255,16.185 8.184,16.256 7.62,16.256
  Bottom Layer w0.5: VD1.2 v1(5.715,21.356) ; v1(6.35,22.225) VT1.3 ; 6.927,17.123 v1@6.927,17.773 ; 7.112,16.383 C16.2@7.493,16.383
NetC17_2: C17.2 DA3.8 | length 2.2
  Bottom Layer w0.25: DA3.8 5.715,12.861 6.073,12.503 6.073,12.19 6.198,12.065 C17.2
NetC18_1: C18.1 DD3.8 ZL2.2 | length 3.6
  Top Layer w0.25: C18.1@0.067,5.793 C18.1@0.067,5.783 ; C18.1@0.113,5.737 C18.1@0.067,5.783 ; DD3.8 0.75,5.797 0.697,5.85 ; ZL2.2 0.697,5.85 ; C18.1@0.067,5.783 C18.1 0.697,5.85
NetDA2_1: DA2.1 HL4.K | length 6.7
  Top Layer w0.25: HL4.K 4.445,31.115 5.08,31.75 v1(8.255,31.75)
  Bottom Layer w0.25: DA2.1 7.89,31.43 8.21,31.75 v1(8.255,31.75)
NetDA2_5: DA2.5 R5.1 | length 2.5
  Bottom Layer w0.25: R5.1 2.665,30.97 2.665,31.284 2.811,31.43 DA2.5
NetDA3_2: DA3.2 L1.2 | length 3.2
  Bottom Layer w0.25: 5.19,17.214 5.19,17.162 5.215,17.137 DA3.2
  Bottom Layer w0.5: L1.2 4.519,18.696 4.672,18.696 5.19,18.178 5.19,17.214
NetDA3_4: DA3.4 L1.1 | length 3.2
  Bottom Layer w0.25: DA3.4 6.215,17.189 6.24,17.214
  Bottom Layer w0.5: 6.24,17.214 6.22,17.234 6.22,18.158 6.712,18.65 6.865,18.65 L1.1
NetDA3_10: DA3.10 R6.1 R7.2 | length 3.6
  Bottom Layer w0.25: R6.1 2.048,12.573 3.159,12.573 R7.2 3.191,12.573 3.683,12.573 4.715,13.605 DA3.10
NetDD1_4: DD1.4 X7.1 | length 1.7
  Bottom Layer w0.25: X7.1 -2.396,23.732 -2.396,23.478 -2.118,23.2 DD1.4
NetDD1_16: DD1.16 X6.1 | length 2.5
  Bottom Layer w0.25: X6.1 -1.409,18.657 -0.901,18.657 -0.31,19.248 DD1.16
NetDD2_1: DD2.1 XP1.9 XP4.1 | length 27.5
  Top Layer w0.25: DD2.1 3.79,11.45 5.715,9.525 5.715,4.445 XP4.1 ; v1(4.064,-3.937) 4.064,-2.953 4.598,-2.42 v1(4.598,-1.244)
  Bottom Layer w0.25: XP1.9@2.905,-2.827 2.54,-3.193 XP1.9 3.715,-3.683 3.969,-3.937 v1(4.064,-3.937) ; v1(4.598,-1.244) 5.842,0 XP4.1
NetDD2_3: DD2.3 XP6.1 | length 9.1
  Top Layer w0.25: DD2.3 1.979,12.446 4.064,12.446 6.35,10.16 XP6.1
NetDD2_4: DD2.4 XP7.1 | length 8.4
  Top Layer w0.25: DD2.4 4.126,12.95 4.522,12.554 10.014,12.554 XP7.1
NetDD2_5: DD2.5 XP8.1 | length 9.3
  Top Layer w0.25: DD2.5 4.191,13.45 4.687,12.954 7.112,12.954 9.181,15.023 9.943,15.023 XP8.1
NetDD2_12: DD2.12 XP20.1 | length 10.5
  Top Layer w0.25: XP20.1 -10.097,17.843 -7.048,17.843 -4.445,15.24 -1.406,15.24 -1.26,15.094 -1.26,14.685 DD2.12
NetDD2_13: DD2.13 XP19.1 | length 8.7
  Top Layer w0.25: XP19.1 -6.985,15.24 -5.695,13.95 DD2.13
NetDD2_14: DD2.14 XP18.1 | length 8.5
  Top Layer w0.25: XP18.1 -6.35,12.7 -5.6,13.45 DD2.14
NetDD2_22: DD2.22 X1.1 | length 3.5
  Top Layer w0.25: DD2.22 0.25,9.37 0.635,8.985 v1(0.635,8.89)
  Bottom Layer w0.25: v1(0.635,8.89) 0.702,8.823 0.702,8.289 1.27,7.721 X1.1
NetDD2_24: DD2.24 XP1.7 XP25.1 | length 33.3
  Top Layer w0.25: DD2.24 1.25,10.306 1.396,10.16 4.318,10.16 5.315,9.163 5.315,4.279 8.636,0.958 8.636,-2.286 8.89,-2.54 XP25.1
  Bottom Layer w0.25: XP1.7 1.27,-1.778 1.651,-1.397 2.794,-1.397 3.937,-2.54 5.969,-4.572 9.271,-4.572 10.287,-3.556 10.287,-2.667 XP25.1
NetDD3_1: DD3.1 R8.2 | length 4.4
  Top Layer w0.25: v1(-2.54,0.762) -1.798,0.762 -1.544,0.508 -0.896,0.508 -0.75,0.654 DD3.1
  Bottom Layer w0.25: R8.2 -3.895,0 -3.2,0.695 -2.607,0.695 v1(-2.54,0.762)
NetDD3_4: DD3.4 X2.1 | length 4.1
  Top Layer w0.25: DD3.4 0.762,1.347 0.762,0.927 0.908,0.781 1.905,0.781 2.267,1.143 v1(2.286,1.143) ; v1@2.286,1.016 v1@2.413,1.016
  Bottom Layer w0.25: v1(2.286,1.143) 3.048,1.143 X2.1
NetDD3_9: DD3.9 X3.1 | length 2.7
  Top Layer w0.25: v1(0.175,4.955) 0.212,4.917 0.212,3.759 DD3.9
  Bottom Layer w0.25: v1(0.175,4.955) 0.242,5.022 0.577,5.022 X3.1
NetDD3_10: DD3.10 X4.1 | length 3.1
  Top Layer w0.25: v1(-1.016,5.334) -0.254,4.572 -0.254,3.725 DD3.10
  Bottom Layer w0.25: v1(-1.016,5.334) -1.016,5.429 -0.779,5.666 -0.779,6.206 X4.1
NetDD3_11: DD3.11 X5.1 | length 3.6
  Top Layer w0.25: v1(-1.905,4.445) -0.896,4.445 -0.75,4.299 DD3.11
  Bottom Layer w0.25: X5.1 v1(-1.905,4.445)
NetDD3_12: DD3.12 R9.2 | length 3.3
  Top Layer w0.25: v1(-2.54,3.048) -2.532,3.04 DD3.12
  Bottom Layer w0.25: R9.2 -3.849,3.714 -3.46,3.714 -2.861,3.115 -2.607,3.115 v1(-2.54,3.048)
NetDD3_13: DD3.13 R10.2 | length 3.2
  Top Layer w0.25: v1(-2.54,2.286) -2.445,2.286 -2.191,2.54 DD3.13
  Bottom Layer w0.25: R10.2 -3.302,2.54 -3.048,2.286 v1(-2.54,2.286)
NetDD3_14: DD3.14 R11.2 | length 3.3
  Top Layer w0.25: v1(-2.54,1.512) -2.445,1.512 -1.917,2.04 DD3.14
  Bottom Layer w0.25: R11.2 -3.302,1.27 -3.06,1.512 v1(-2.54,1.512)
NetHL1_A: HL1.A R12.1 | length 3
  Top Layer w0.25: HL1.A 7.447,-3.93 8.346,-3.93 v1(8.413,-3.997)
  Bottom Layer w0.25: R12.1@6.985,-3.81 6.985,-3.8 7.11,-3.675 7.996,-3.675 8.318,-3.997 v1(8.413,-3.997) ; R12.1 R12.1@6.985,-3.625
NetHL2_K: HL2.K R2.1 | length 2.7
  Top Layer w0.25: v1(-5.715,19.05) -5.715,19.145 -5.5,19.36 HL2.K
  Bottom Layer w0.25: R2.1 -5.84,20.32 -5.715,20.195 v1(-5.715,19.05)
NetHL3_K: HL3.K R3.1 | length 2.9
  Top Layer w0.25: HL3.K@-5.715,22.86 HL3.K -5.5,23.82 -5.715,24.035 v1(-5.715,24.13)
  Bottom Layer w0.25: R3.1@-5.715,22.86 -5.782,22.927 -5.782,24.063 v1(-5.715,24.13)
NetHL4_A: HL4.A R1.1 | length 1.5
  Top Layer w0.25: HL4.A 1.755,31.05 1.755,30.265 2,30.02 2,29.97 2.125,29.845 R1.1
nReset: DD2.19 SB1.1 XP1.1 XP26.1 | length 26.5
  Top Layer w0.25: XP26.1 SB1.1@-6.985,0 ; v1(-6.985,-2.54) SB1.1@-6.985,0 ; SB1.1@-6.985,5.715 SB1.1@-6.985,0 ; SB1.1@-6.98,5.74 -6.98,8.885 -6.34,9.525 -1.683,9.525 -1.25,9.958 DD2.19
  Bottom Layer w0.25: v1@-7.025,-2.5 -5.842,-3.683 XP1.1
SPI_MiSo: DD2.18 R8.1 XP14.1 | length 21.2
  Top Layer w0.25: XP14.1 -8.89,2.54 -7.747,3.683 -7.747,4.818 -7.755,4.826 -7.755,6.654 -7.747,6.662 -7.747,8.763 -5.06,11.45 DD2.18 ; -0.803,1.27 -0.75,1.323 -0.75,1.359
  Bottom Layer w0.25: XP14.1 -8.255,2.54 -5.715,0 R8.1
SPI_MoSi: DD2.17 R11.1 XP15.1 | length 20.2
  Top Layer w0.25: XP15.1 -9.017,5.08 -8.155,5.942 -8.155,8.921 -5.126,11.95 DD2.17 ; -0.937,2.03 -0.927,2.04
  Bottom Layer w0.25: XP15.1@-10.795,5.08 XP15.1 -9.816,4.736 -9.181,4.736 -5.715,1.27 R11.1
SPI_nCS_IMU: DD2.15 R9.1 XP17.1 | length 19.4
  Top Layer w0.25: XP17.1 -8.116,10.16 -5.326,12.95 DD2.15
  Bottom Layer w0.25: XP17.1 -8.89,10.16 -6.985,8.255 -6.985,4.445 -6.35,3.81 R9.1
SPI_SCLK: DD2.16 R10.1 XP16.1 | length 19.2
  Top Layer w0.25: XP16.1 -9.535,8.245 -9.027,8.245 -8.633,8.639 -8.633,9.078 -5.261,12.45 DD2.16
  Bottom Layer w0.25: XP16.1 -8.89,7.62 -7.62,6.35 -7.62,3.81 -6.35,2.54 R10.1
USB_N: DD1.7 XS1.2 | length 6.9
  Top Layer w0.25: XS1.2 -3.16,26.73 -2.568,26.138 0.075,26.138 0.75,25.463 v1(0.75,25.4)
  Bottom Layer w0.25: v1(0.75,25.4) 0.75,25.305 0.99,25.065 DD1.7
USB_P: DD1.6 XS1.3 | length 6.8
  Top Layer w0.25: XS1.3 -3.81,26.73 -2.48,25.4 v1(0,25.4)
  Bottom Layer w0.25: v1(0,25.4) 0,25.305 0.34,24.965 DD1.6
V_bat: DA2.3 VT1.2 XP24.1 XP27.1 | length 7.8
  Bottom Layer w0.25: DA2.3 7.24,29.53 7.39,29.38 7.39,28.228 XP24.1 ; XP24.1@7.102,27.823 XP24.1@7.3,27.625
  Bottom Layer w0.5: XP24.1@7.3,27.625 VT1.2 ; XP27.1 7.35,25.4 VT1.2@7.3,25.45 ; VT1.2@7.3,25.45 VT1.2 ; VT1.2@7.3,25.45 VT1.2
pads on no net: DD1.5 DD1.11 DD1.12 DD1.14 HL1.0 HL2.0 HL3.0 HL4.0 VD1.0 XP1.3 XP1.4 XP1.5 XS1.4

## Polygon pours and split planes (outlines as drawn)
GND on Top Layer "GND_L01_P000" (solid, remove dead copper, pour order 0): -11.5,32.5 11.5,32.5 11.5,-5 -11.5,-5
GND on Bottom Layer "GND_L02_P001" (solid, remove dead copper, pour order 1): -11.5,32.5 11.5,32.5 11.5,-5 -11.5,-5

## Silkscreen, mask and mechanical layers (free items; w line width, h text height)
Top Overlay:
  lines w0.2: 6.604,26.289 6.604,26.67 ; 7.493,25.654 8.763,25.273
  text "5V" at 9.348,31.532 h1.5
  text "Gnd" at -7.648,26.797 h1.5 r90
  text "Bat" at 5.526,25.563 h1.5
  text "Gnd" at -8.255,24.92 h1.5
  text "A8" at -3.81,22.386 h1.5
  text "A14" at -3.81,19.838 h1.5
  text "A5" at 7.302,19.848 h1.5
  text "A15" at -8.255,17.306 h1.5
  text "A4" at 7.313,17.3 h1.5
  text "A16" at -8.255,14.766 h1.5
  text "A3" at 7.309,14.766 h1.5
  text "A17" at -8.255,12.218 h1.5
  text "A2" at 7.319,12.218 h1.5
  text "A18" at -8.255,9.686 h1.5
  text "A1" at 7.495,9.678 h1.5
  text "A19" at -8.255,7.146 h1.5
  text "A0" at 7.312,7.146 h1.5
  text "A0" at 4.291,5.495 h1.5
  text "A22" at -8.027,3.683 h1.5 r90
  text "A23" at -7.908,0.635 h1.5 r90
  text "Res" at -6.477,-2.631 h1.5
  text "3.3V" at 5.004,-2.76 h1.5
  text "Gnd" at -8.029,-4.699 h1.5 r90
Bottom Overlay:
  text "Gnd" at 8.608,29.29 h1.5 r90
  text "3.3V" at 8.255,4.606 h1.5
  text "3.3V" at 8.255,2.066 h1.5
  text "A31" at 8.255,-0.474 h1.5
  text "A30" at 8.255,-1.744 h1.5
Mechanical 3:
  the board outline again, w0.1

## Text inside footprints (layer, text, board x,y; h text height)
DD3: Top Overlay "*" at -0.365,0.089 h1.5 r90; Mechanical 13 "*" at -0.365,1.359 h1.5 r90